# EAGLE board megaUSB_spider (EAGLE 6.5.0)
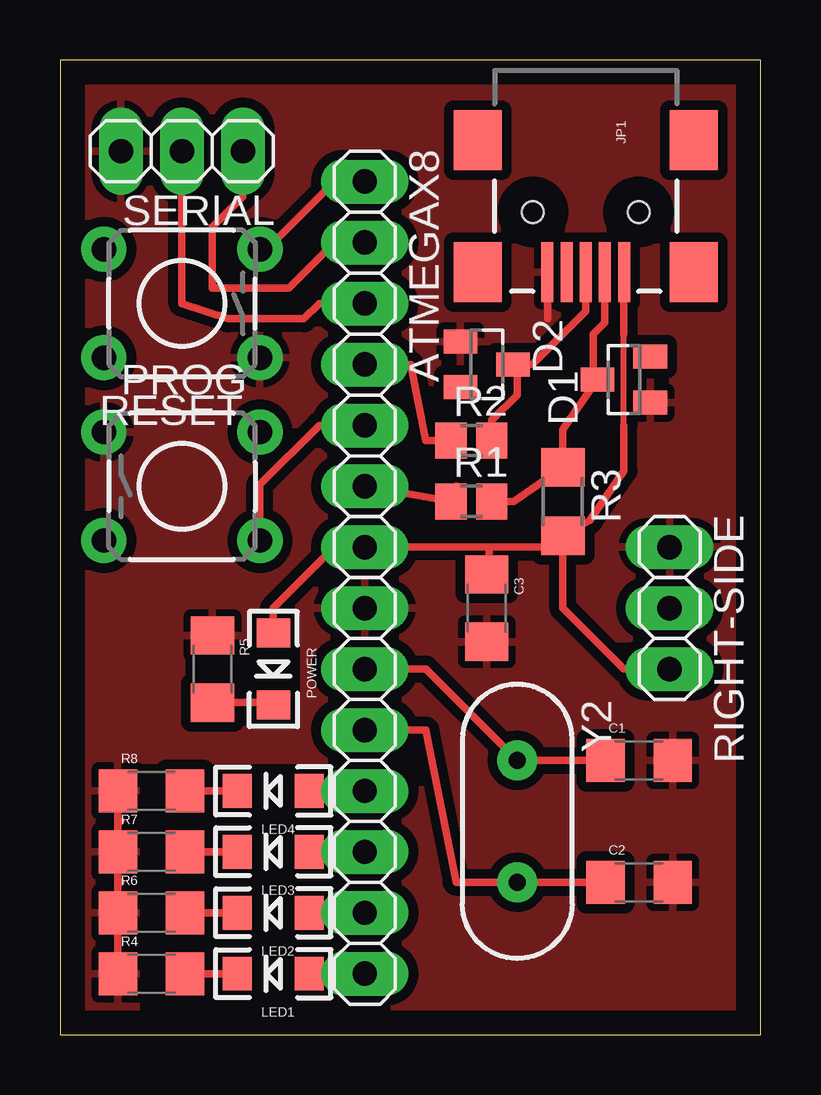
[diagram p0: board, top side]

Size 29.2 x 40.63 mm. Coordinates in mm from the lower left corner, seen from the top.
Outline: 0,0 29.2,0 29.2,40.63 0,40.63 0,0
Copper layers (1*16): Top 0.035mm / dielectric 1.5mm / Bottom 0.035mm
Design rules "improved_12mil": minimum track width 12mil, minimum drill 0.8mm, track to track 12mil, track to pad 12mil, pad to pad 12mil, via to via 12mil, smd to smd 12mil, copper to edge 40mil, drill to drill 12mil, minimum pad ring 16mil, minimum via ring 16mil, stop-mask expansion 4mil, vias tented up to drill 0mil, thermal gap 12mil

## Footprints (pad centres in the part's own frame; a part is rotated, then mirrored left to right if it is on the bottom)
1X14 = drill 1.016 long: 1 -16.51,0; 2 -13.97,0; 3 -11.43,0; 4 -8.89,0; 5 -6.35,0; 6 -3.81,0; 7 -1.27,0; 8 1.27,0; 9 3.81,0; 10 6.35,0; 11 8.89,0; 12 11.43,0; 13 13.97,0; 14 16.51,0
1206 = smd 1.6 x 1.8: 1 -1.4,0; 2 1.4,0
SOT23 = smd 1 x 1.4: 1 -0.95,-1.1; 2 0.95,-1.1; 3 0,1.1
USB-MINIB = smd 2.5 x 0.5: D+ 2.5,0; D- 2.5,0.8; GND 2.5,-1.6; ID 2.5,-0.8; VBUS 2.5,1.6 | smd 2.5 x 2: MTN1 -3,4.5; MTN2 2.5,4.5; MTN3 -3,-4.5; MTN4 2.5,-4.5 | hole 0.9: 0,2.2; 0,-2.2
LED-1206 = smd 1.2 x 1.4: A -1.5,0; C 1.5,0
TACTILE-PTH = drill 1.016 pad 1.88: 1 -3.251,2.261; 2 3.251,2.261; 3 -3.251,-2.261; 4 3.251,-2.261
R0805 = smd 1.3 x 1.5: 1 -0.85,0; 2 0.85,0
R1206 = smd 1.6 x 1.803: 1 -1.422,0; 2 1.422,0
1X03 = drill 1.016 long: 1 -2.54,0; 2 0,0; 3 2.54,0
HC49US = drill 0.7 pad 1.651: 1 -2.54,0; 2 2.54,0

## Placement (x,y rotation side)
ATMEGAX8  [1X14]  12.7,19.05 270 top
C1  18pF  [1206]  24.13,11.43 0 top
C2  18pF  [1206]  24.13,6.35 0 top
C3  0.1uF  [1206]  17.78,17.78 270 top
D1  3.6v  [SOT23]  23.5,27.3 90 top
D2  3.6 v  [SOT23]  17.78,27.94 270 top
JP1  USBSMD  [USB-MINIB]  21.91,34.29 270 top
LED1  GREEN  [LED-1206]  8.89,2.54 180 top
LED2  GREEN  [LED-1206]  8.89,5.08 180 top
LED3  GREEN  [LED-1206]  8.89,7.62 180 top
LED4  GREEN  [LED-1206]  8.89,10.16 180 top
POWER  GREEN  [LED-1206]  8.89,15.24 270 top
PROG  [TACTILE-PTH]  5.08,22.86 0 top
R1  68ohm  [R0805]  17.14,22.23 0 top
R2  68 ohm  [R0805]  17.14,24.77 0 top
R3  1.5k Ohm  [R1206]  20.95,22.23 270 top
R4  220 ohm  [1206]  3.81,2.54 0 top
R5  220 ohm  [1206]  6.35,15.24 270 top
R6  220 ohm  [1206]  3.81,5.08 0 top
R7  220 ohm  [1206]  3.81,7.62 0 top
R8  220 ohm  [1206]  3.81,10.16 0 top
RESET  [TACTILE-PTH]  5.08,30.48 180 top
RIGHT-SIDE  [1X03]  25.4,17.78 270 top
SERIAL  [1X03]  5.08,36.83 180 top
Y2  [HC49US]  19.05,8.89 270 top

## Library data of the parts
ATMEGAX8 RIGHT-SIDE SERIAL = pinhead
C1-C3 = SparkFun-Capacitors
D1 D2 = diode
JP1 = SparkFun-Connectors; PROD_ID: CONN-08193
LED1-LED4 POWER = SparkFun-LED; PROD_ID: DIO-00862
PROG RESET = SparkFun-Electromechanical
R1-R3 = resistor
R4-R8 = SparkFun-Passives
Y2 = SparkFun-FreqCtrl

## Nets
D+: D2.3 JP1.D+ R2.2
D-: D1.3 JP1.D- R1.2 R3.1
GND: ATMEGAX8.8 C1.2 C2.2 C3.2 D1.1 D2.1 JP1.GND PROG.1 R4.1 R5.1 R6.1 R7.1 R8.1 RESET.1 RIGHT-SIDE.1 SERIAL.3
LED2: LED2.C R6.2
N$1: LED1.C R4.2
N$3: POWER.C R5.2
N$5: LED3.C R7.2
N$6: LED4.C R8.2
N$7: ATMEGAX8.14
PB0: LED1.A
PD0: ATMEGAX8.2 SERIAL.1
PD1: ATMEGAX8.3 SERIAL.2
PD5: ATMEGAX8.11 LED4.A
PD6: ATMEGAX8.12 LED3.A
PD7: ATMEGAX8.13 LED2.A
PROG: ATMEGAX8.5 PROG.4
RESET: ATMEGAX8.1 RESET.3
USBD+: ATMEGAX8.4 R2.1
USBD-: ATMEGAX8.6 R1.1
VCC: ATMEGAX8.7 C3.1 JP1.VBUS POWER.A R3.2 RIGHT-SIDE.3
XTAL1: ATMEGAX8.9 C1.1 Y2.1
XTAL2: ATMEGAX8.10 C2.1 Y2.2

## Tracks (layer width: path | path; a pad name or v marks a point on that pad's centre or on a via)
D+
  Top 0.305: R2.2 18,25.62 19.05,26.67 19.05,27.77 D2.3 19.69,27.94 21.91,30.16 JP1.D+
D-
  Top 0.305: R1.2 18.9,22.23 R3.1 20.95,25.23 D1.3 22.22,27.48 22.22,29.21 22.71,29.69 JP1.D-
GND
  Top 0.305: 2.41,8.89 R8.1 2.54,10.16 2.26,10.01 | 2.41,8.89 R7.1 | R7.1 2.41,6.35 | 2.41,6.35 R6.1 | R6.1 R4.1 | 2.56,5.23 2.54,5.08 R6.1 | 2.54,7.62 2.26,7.47 | 2.54,7.62 2.56,7.77 | 2.54,7.62 R7.1 | 2.54,8.89 2.41,8.89 | 2.54,6.35 2.41,6.35 | 2.54,38.1 SERIAL.3 | 20.32,29.84 20.32,30.48
  pour Top (isolate 0.406): 0,40.64 0,16.51 29.21,16.51 29.21,40.64
  pour Top (isolate 0.406): 12.7,17.78 12.7,0 27.94,0 29.21,1.27 29.21,17.78
  pour Top (isolate 0.406): 3.17,0 3.17,17.78 2.86,18.1 0,18.1 0,0
  pour Top (isolate 0.406): 0,16.51 5.08,16.51 5.08,12.7 10.16,12.7 10.16,20.32 15.24,20.32 15.24,11.43 0,11.43
LED2
  Top 0.305: LED2.C R6.2
N$1
  Top 0.305: LED1.C R4.2
N$3
  Top 0.305: R5.2 8.79,13.84 POWER.C
N$5
  Top 0.305: LED3.C R7.2
N$6
  Top 0.305: LED4.C R8.2
PD0
  Top 0.305: ATMEGAX8.2 11.43,33.02 9.52,31.12 6.35,31.12 6.35,33.66 7.62,34.92 SERIAL.1
PD1
  Top 0.305: ATMEGAX8.3 10.8,30.48 10.16,29.84 6.98,29.84 5.08,30.48 SERIAL.2
PD5
  Top 0.305: ATMEGAX8.11 LED4.A
PD6
  Top 0.305: ATMEGAX8.12 LED3.A
PD7
  Top 0.305: ATMEGAX8.13 LED2.A
PROG
  Top 0.305: PROG.4 8.33,22.94 10.8,25.4 ATMEGAX8.5
RESET
  Top 0.305: ATMEGAX8.1 11.43,35.56 8.89,33.02 RESET.3
USBD+
  Top 0.305: ATMEGAX8.4 14.61,27.94 15.24,24.77 R2.1
USBD-
  Top 0.305: ATMEGAX8.6 R1.1 16.51,22.86
VCC
  Top 0.254: 23.5,25.4 23.5,29.21
  Top 0.305: POWER.A 8.89,17.78 11.43,20.32 ATMEGAX8.7 17.78,20.32 17.91,20.3 | 17.91,20.3 17.91,20.32 21.11,20.32 R3.2 | 17.91,20.3 C3.1 | R3.2 22.07,21.44 23.5,23.49 23.5,25.4 | RIGHT-SIDE.3 23.5,15.24 20.95,17.78 R3.2 | JP1.VBUS 23.5,31.79 23.5,29.21
XTAL1
  Top 0.305: C1.1 Y2.1 15.24,15.24 ATMEGAX8.9
XTAL2
  Top 0.305: ATMEGAX8.10 15.24,12.7 16.51,6.35 Y2.2 C2.1